# EAGLE board Servorino_FT230X (EAGLE 9.6.2)
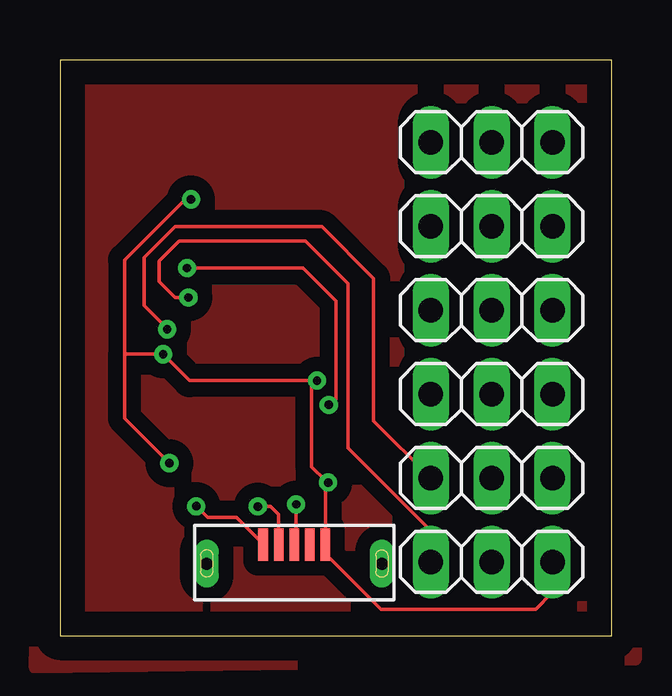
[diagram p0: board, top side]
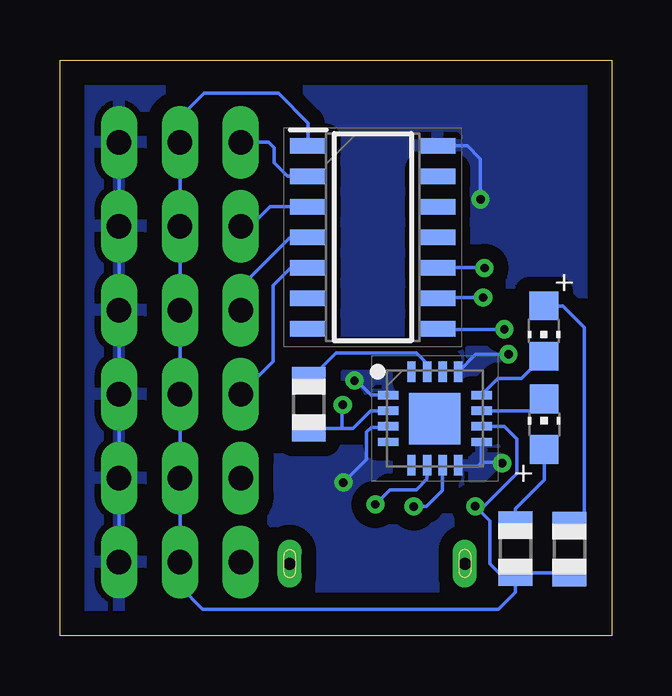
[diagram p1: board, bottom side, seen from below]

Size 23 x 24 mm. Coordinates in mm from the lower left corner, seen from the top.
Outline: 0,0 23,0 23,24 0,24 0,0
Copper layers (1*16): Top 0.035mm / dielectric 1.5mm / Bottom 0.035mm
Design rules "default": minimum track width 6mil, minimum drill 0.35mm, track to track 6mil, track to pad 6mil, pad to pad 6mil, via to via 6mil, smd to smd 6mil, copper to edge 40mil, drill to drill 6mil, minimum pad ring 10mil, minimum via ring 8mil, stop-mask expansion 4mil, vias tented up to drill 0mil, thermal gap 10mil

## Footprints (pad centres in the part's own frame; a part is rotated, then mirrored left to right if it is on the bottom)
QFN65P400X400X80-17N = smd 0.85 x 0.35: 1 -1.95,0.975; 2 -1.95,0.325; 3 -1.95,-0.325; 4 -1.95,-0.975; 9 1.95,-0.975; 10 1.95,-0.325; 11 1.95,0.325; 12 1.95,0.975 | smd 0.35 x 0.85: 5 -0.975,-1.95; 6 -0.325,-1.95; 7 0.325,-1.95; 8 0.975,-1.95; 13 0.975,1.95; 14 0.325,1.95; 15 -0.325,1.95; 16 -0.975,1.95 | smd 2.15 x 2.15: 17 0,0
SOIC127P600X175-14N = smd 1.5 x 0.65: 1 -2.7,3.81; 2 -2.7,2.54; 3 -2.7,1.27; 4 -2.7,0; 5 -2.7,-1.27; 6 -2.7,-2.54; 7 -2.7,-3.81; 8 2.7,-3.81; 9 2.7,-2.54; 10 2.7,-1.27; 11 2.7,0; 12 2.7,1.27; 13 2.7,2.54; 14 2.7,3.81
1X03 = drill 1.016 long: 1 -2.54,0; 2 0,0; 3 2.54,0
R0805 = smd 1.1 x 1.4: 1 -1,0; 2 1,0
CHIP-LED0805 = smd 1.2 x 1.2: A 0,-1.05; C 0,1.05
USB3140-30-0170-0-C = smd 0.4 x 1.35: 1 -1.3,0; 2 -0.65,0; 3 0,0; 4 0.65,0; 5 1.3,0 | drill 0.5 pad 0.775 long: S1 3.65,-0.8; S3 -3.65,-0.8

## Placement (x,y rotation side)
IC1  FT230XQ-R  [QFN65P400X400X80-17N]  7.37,9.05 0 bottom
IC8  ATTINY404-SSNR  [SOIC127P600X175-14N]  9.95,16.61 0 bottom
JP1  [1X03]  18,20.57 0 top
JP2  [1X03]  18,17.07 0 top
JP3  [1X03]  18,13.57 0 top
JP4  [1X03]  18,10.07 0 top
JP5  [1X03]  18,6.57 0 top
JP6  [1X03]  18,3.07 0 top
R4  1K  [R0805]  4.01,3.62 90 bottom
R5  1K  [R0805]  1.76,3.61 90 bottom
R6  470  [R0805]  12.62,9.64 90 bottom
RX1  Green  [CHIP-LED0805]  2.81,8.81 0 bottom
TX1  Red  [CHIP-LED0805]  2.82,12.7 180 bottom
U$1  USB3140  [USB3140-30-0170-0-C]  9.77,3.8 0 top

## Library data of the parts
IC1 = SamacSys_Parts; DESCRIPTION: X-Chip USB to Basic UART Interface FTDI Chip FT230XQ-R UART Interface 3MBd, 5 V, 16-Pin, QFN; HEIGHT: 0.8mm; MANUFACTURER_NAME: FTDI Chip; MANUFACTURER_PART_NUMBER: FT230XQ-R; MOUSER_PART_NUMBER: 895-FT230XQ-R; MOUSER_PRICE-STOCK: https://www.mouser.co.uk/ProductDetail/FTDI/FT230XQ-R?qs=Gp1Yz1mis3VvmXwyDmIHOg%3D%3D
IC8 = SamacSys_Parts; DESCRIPTION: MICROCHIP - ATTINY404-SSNR - MCU, 8BIT, 20MHZ, SOIC-14; HEIGHT: 1.75mm; MANUFACTURER_NAME: Microchip; MANUFACTURER_PART_NUMBER: ATTINY404-SSNR; MOUSER_PART_NUMBER: 556-ATTINY404-SSNR; MOUSER_PRICE-STOCK: https://www.mouser.co.uk/ProductDetail/Microchip-Technology-Atmel/ATTINY404-SSNR?qs=F5EMLAvA7IAEqD7Aw0z%252B9Q%3D%3D
JP1-JP6 = pinhead
R4-R6 RX1 TX1 = adafruit
U$1 = USB

## Nets
GND: IC1.1 IC1.3 IC1.8 IC1.9 IC1.13 IC8.14 JP1.3 JP2.3 JP3.3 JP4.3 JP5.3 JP6.3 U$1.5
N$1: IC8.2 JP1.1
N$2: IC8.9 JP6.1
N$3: IC8.8 JP5.1
N$4: IC8.3 JP2.1
N$5: IC8.4 JP3.1
N$6: IC8.5 JP4.1
N$7: R4.2 RX1.A
N$8: R5.2 TX1.A
N$9: IC1.11 RX1.C
N$10: IC1.12 TX1.C
N$11: IC1.15 R6.2
N$12: IC1.6 U$1.3
N$13: IC1.2 IC8.10 R6.1
N$14: IC1.7 U$1.2
VCC: IC1.10 IC8.1 JP1.2 JP2.2 JP3.2 JP4.2 JP5.2 JP6.2 R4.1 R5.1 U$1.1

## Tracks (layer width: path | path; a pad name or v marks a point on that pad's centre or on a via)
GND  (via drill 0.35)
  Top 0.152: 11.07,6.46 U$1.5 11.07,3.4 13.38,1.09 19.84,1.09 20.54,1.79 JP6.3 | v11.18,6.38 v11.19,6.37 11.19,6.36 11.18,6.35 11.07,6.46 | v4.56,7.19 2.69,9.06 2.69,11.69 | 2.69,11.69 2.69,15.66 5.21,18.18 v5.46,18.18 | 2.69,11.69 2.73,11.73 v4.3,11.73 5.4,10.63 v10.72,10.63 10.49,10.4 10.49,7.04 11.07,6.46
  Bottom 0.152: JP6.3 JP5.3 JP4.3 JP3.3 JP2.3 JP1.3 | IC1.3 9.37,8.68 10.02,8.68 10.21,8.49 10.21,7.35 v11.18,6.38 | IC1.9 5.42,7.21 | 5.42,7.21 5.57,7.06 6.36,7.06 IC1.8 | 5.42,7.21 4.64,7.21 4.62,7.19 v4.56,7.19 | IC8.14 6.01,20.42 5.46,19.86 5.46,18.22 5.48,18.2 v5.46,18.18 | IC1.13 5.68,11.71 4.3,11.71 v4.3,11.73 | IC1.1 10.03,10.03 10.65,10.65 10.7,10.65 v10.72,10.63
  pour Bottom (isolate 0.61): -1,24.5 24,24.5 23.58,-1.17 -1.56,-1.17
N$1
  Bottom 0.152: JP1.1 14.31,20.57 14.08,20.34 14.08,19.72 13.51,19.15 IC8.2
N$2  (via drill 0.35)
  Top 0.152: JP6.1 15.46,4.37 12.01,7.82 12.01,14.68 10.24,16.45 4.97,16.45 4.13,15.61 4.13,14.76 4.79,14.1 v5.36,14.1
  Bottom 0.152: v5.36,14.1 7.23,14.1 IC8.9
N$3  (via drill 0.35)
  Top 0.152: JP5.1 13.08,8.95 13.08,14.89 10.92,17.05 4.8,17.05 3.51,15.76 3.51,13.76 4.47,12.8 v4.47,12.77
  Bottom 0.152: v4.47,12.77 7.22,12.77 IC8.8
N$4
  Bottom 0.152: JP2.1 15.05,17.07 14.24,17.88 IC8.3
N$5
  Bottom 0.152: JP3.1 15.46,14.53 13.38,16.61 IC8.4
N$6
  Bottom 0.152: JP4.1 14.11,11.42 14.11,14.6 13.37,15.34 IC8.5
N$7
  Bottom 0.152: RX1.A 2.81,6.49 4.01,5.29 R4.2
N$8
  Bottom 0.152: R5.2 1.45,4.61 1.13,4.93 1.13,12.85 2.03,13.75 TX1.A
N$9
  Bottom 0.152: IC1.11 3.29,9.38 RX1.C
N$10
  Bottom 0.152: IC1.12 4.74,10.71 3.76,10.71 TX1.C
N$11
  Bottom 0.152: R6.2 11.48,11.78 8.13,11.78 7.7,11.35 IC1.15
N$12  (via drill 0.35)
  Top 0.152: v9.85,5.47 9.85,3.88 U$1.3
  Bottom 0.152: v9.85,5.47 9.24,6.08 8.14,6.08 7.7,6.53 IC1.6
N$13  (via drill 0.35)
  Top 0.152: v5.29,15.32 10.12,15.32 11.51,13.94 11.51,9.85 11.28,9.62 v11.21,9.62
  Bottom 0.152: IC1.2 10.05,9.38 10.79,8.64 11.24,8.64 | 11.24,8.64 R6.1 | IC8.10 5.33,15.34 5.32,15.35 v5.29,15.32 | v11.21,9.62 11.24,9.59 11.24,8.64
N$14  (via drill 0.35)
  Top 0.152: U$1.2 9.12,5.06 8.79,5.39 8.29,5.39 8.28,5.38 v8.25,5.38
  Bottom 0.152: IC1.7 7.04,6.04 7.71,5.38 v8.25,5.38
TOPSIGNAL
  pour Top (isolate 0.61): -0.5,24.5 24,24.5 24,-1 -1.05,-1.35
VCC  (via drill 0.35)
  Top 0.152: U$1.1 8.47,3.82 7.37,4.92 6.15,4.92 v5.68,5.39
  Bottom 0.152: IC8.1 12.65,21.37 13.89,22.61 17,22.61 18,21.61 JP1.2 JP2.2 JP3.2 JP4.2 JP5.2 JP6.2 18,2.04 17.05,1.09 4.72,1.09 4.01,1.8 R4.1 | IC1.10 4.47,8.72 3.94,8.19 3.94,6.77 5.33,5.38 5.74,5.38 5.73,5.39 v5.68,5.39 5.07,4.78 5.07,3 4.69,2.62 R4.1 | R4.1 R5.1